# Allegro board BSTPLC.brd
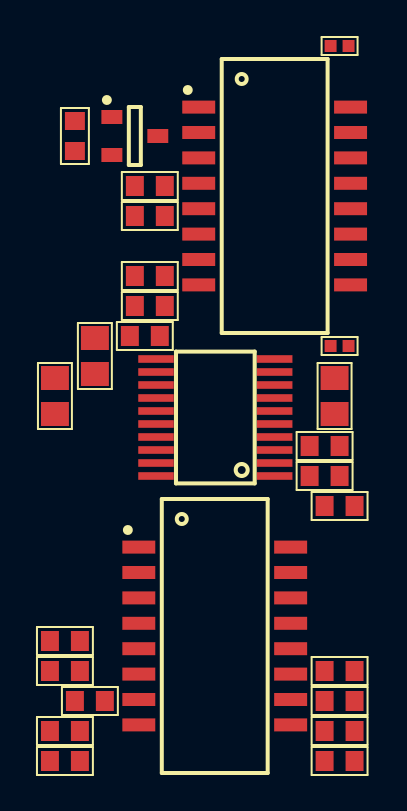
[diagram p0: board, top side]
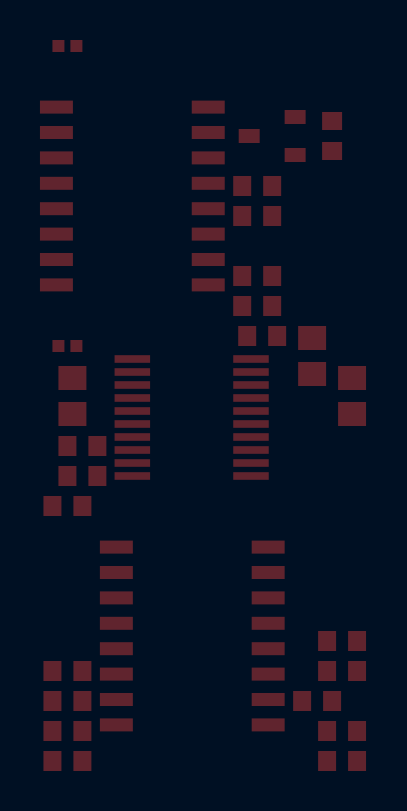
[diagram p1: board, bottom side, seen from below]

No outline. copper layers: TOP, LAYER2, LAYER3, LAYER4, LAYER5, BOTTOM. Coordinates in mm from the lowest, leftmost part position.

## Placement (name value [footprint] x y rotation side)
C1  100nF  [C0603]  1 31.25 270 top
C2  10nF  [C0603]  4.75 24.25 0 top
C3  1.0uF  [C0603]  14.25 4.5 0 top
C4  1.0uF  [C0603]  0.5 4.5 0 top
C6  1.0uF  [C0603]  0.5 6 0 top
C7  100nF  [C0603]  14.25 1.5 0 top
C8  100nF  [C0603]  0.5 1.5 0 top
C9  100nF  [C0603]  14.25 0 0 top
C10  100nF  [C0603]  0.5 0 0 top
D1  -  [SOT95P240X130-3N]  4 31.25 0 top
IC1  -  [SOIC127P835X237-16N]  11 28.25 0 top
IC2  -  [TSSOP20MA_065]  11 14.25 90 top
IC3  -  [SOIC127P835X237-16N]  8 6.25 0 top
R1  51  [C0402]  14.25 35.75 0 top
R2  12  [C0805]  14 18.25 90 top
R3  51  [C0603]  4.75 28.75 0 top
R4  51  [C0402]  14.25 20.75 0 top
R5  100  [C0603]  4.75 22.75 0 top
R6  100  [C0805]  2 20.25 270 top
R7  100  [C0603]  4.75 27.25 0 top
R8  100  [C0805]  0 18.25 90 top
R9  33k  [C0603]  13.5 15.75 0 top
R10  XX  [C0603]  4.5 21.25 0 top
R11  75  [C0603]  14.25 12.75 0 top
R12  75  [C0603]  14.25 3 0 top
R13  75  [C0603]  13.5 14.25 0 top
R14  75  [C0603]  1.75 3 0 top

## Library data of the parts
C1 C7-C10 = CAPCERSMDCL2: part number: CAPCERSMDCL2_0603-100NF,16V; tolerance: 10%
C2 = CAPCERSMDCL2: part number: CAPCERSMDCL2_0603-10NF,50V; tolerance: 10%
C3 C4 C6 = CAPCERSMDCL2: part number: CAPCERSMDCL2_0603-1.0UF,6.3V; tolerance: 10%
D1 = DIODE_DUAL_SERIES: part number: HBAT-540C
IC1 = DELAY_LINE_GL2L: part number: GL2L5LS050D-C
IC2 = MAX9601
IC3 = DELAY_LINE_GL2L: part number: GL2L5LS100D-C
R1 R4 = RSMD0402: part number: RSMD0402_1/16W-51,1%; tolerance: 1%
R2 = RSMD0805: part number: RSMD0805_125MW-12,1%; tolerance: 1%
R3 = RSMD0603: part number: RSMD0603_1/10W-51,1%; tolerance: 1%
R5 R7 = RSMD0603: part number: RSMD0603_1/10W-100,1%; tolerance: 1%
R6 R8 = RSMD0805: part number: RSMD0805_125MW-100,1%; tolerance: 1%
R9 = RSMD0603: part number: RSMD0603_1/10W-33K,1%; tolerance: 1%
R10 = RSMD0603: part number: RSMD0603_1/10W-XX,1%; tolerance: 1%
R11-R14 = RSMD0603: part number: RSMD0603_1/10W-75,1%; tolerance: 1%

## Footprints (pads in the part's own frame, mm; a bottom-side part is the same pattern mirrored in y, then rotated)
C0402
  rect 0.6x0.6 smd: 1(-0.45,0) 2(0.45,0)
C0603
  rect 0.9x1 smd: 1(-0.75,0) 2(0.75,0)
C0805
  rect 1.2x1.4 smd: 1(-0.9,0) 2(0.9,0)
SOIC127P835X237-16N
  rect 1.65x0.65 smd: 1(-3.8,4.445) 2(-3.8,3.175) 3(-3.8,1.905) 4(-3.8,0.635) 5(-3.8,-0.635) 6(-3.8,-1.905) 7(-3.8,-3.175) 8(-3.8,-4.445) 9(3.8,-4.445) 10(3.8,-3.175) 11(3.8,-1.905) 12(3.8,-0.635) 13(3.8,0.635) 14(3.8,1.905) 15(3.8,3.175) 16(3.8,4.445)
SOT95P240X130-3N
  rect 1.05x0.7 smd: 1(-1.15,0.95) 2(-1.15,-0.95) 3(1.15,0)
TSSOP20MA_065
  rect 0.381x1.778 smd: 1(0,0) 2(0.65,0) 3(1.3,0) 4(1.95,0) 5(2.6,0) 6(3.25,0) 7(3.9,0) 8(4.55,0) 9(5.2,0) 10(5.85,0) 11(5.85,5.94) 12(5.2,5.94) 13(4.55,5.94) 14(3.9,5.94) 15(3.25,5.94) 16(2.6,5.94) 17(1.95,5.94) 18(1.3,5.94) 19(0.65,5.94) 20(0,5.94)

## Nets
GND_SIGNAL: C2.1(A<0>) C3.1(A<0>) C4.1(A<0>) C6.1(A<0>) C7.1(A<0>) C8.1(A<0>) C9.1(A<0>) C10.1(A<0>) IC1.1(SH<0>) IC1.3(SH<1>) IC1.4(SH<2>) IC1.5(SH<3>) IC1.6(SH<4>) IC1.8(SH<5>) IC1.9(SH<6>) IC1.11(SH<7>) IC1.12(SH<8>) IC1.13(SH<9>) IC1.14(SH<10>) IC1.16(SH<11>) IC2.4(LE<0>) IC2.17(LE<0>) IC3.1(SH<0>) IC3.3(SH<1>) IC3.4(SH<2>) IC3.5(SH<3>) IC3.6(SH<4>) IC3.8(SH<5>) IC3.9(SH<6>) IC3.11(SH<7>) IC3.12(SH<8>) IC3.13(SH<9>) IC3.14(SH<10>) IC3.16(SH<11>) R1.1(A<0>) R4.1(A<0>) R6.1(A<0>) R7.1(A<0>) R8.1(A<0>) R9.1(A<0>) R10.1(A<0>) R11.1(A<0>) R12.1(A<0>) R13.1(A<0>) R14.1(A<0>)
P2V5: C3.2(B<0>) C8.2(B<0>) IC2.3(VCCO_<0>) IC2.5(LE*<0>) IC2.16(LE*<0>) IC2.18(VCCO_<1>)
P5V: C1.2(B<0>) C4.2(B<0>) C7.2(B<0>) C10.2(B<0>) D1.2(C) IC2.7(VCC<0>) IC2.14(VCC<1>)
VIN: R2.1(A<0>)
CFD_OUT: IC3.7(B1) R14.2(B<0>)
CFD_OUT*: IC3.10(B2) R12.2(B<0>)
LEADING_EDGE_OUT: IC2.1(Q<0>) R13.2(B<0>)
LEADING_EDGE_OUT*: IC2.2(Q*<0>) R11.2(B<0>)
M5V: C1.1(A<0>) C6.2(B<0>) C9.2(B<0>) D1.1(A) IC2.6(VEE<0>) IC2.15(VEE<1>)
UNNAMED_1_CAPCERSMDCL2_I78_B: C2.2(B<0>) IC2.10(IN+<0>) R5.2(B<0>)
UNNAMED_1_DELAYLINEGL2L_I140_A1: D1.3(AC) IC1.2(A1) IC2.9(IN-<0>) R2.2(B<0>) R3.1(A<0>)
UNNAMED_1_DELAYLINEGL2L_I140_A2: IC1.15(A2) R1.2(B<0>)
UNNAMED_1_DELAYLINEGL2L_I140_B2: IC1.10(B2) R4.2(B<0>)
UNNAMED_1_MAX9601_I1_HYS: IC2.13(HYS<0>) R10.2(B<0>)
UNNAMED_1_MAX9601_I1_IN: IC2.11(IN+<0>) R3.2(B<0>) R7.2(B<0>)
UNNAMED_1_MAX9601_I1_IN_1: IC1.7(B1) IC2.12(IN-<0>) R6.2(B<0>) R8.2(B<0>)
UNNAMED_1_MAX9601_I1_Q: IC2.19(Q*<0>) IC3.15(A2)
UNNAMED_1_MAX9601_I1_Q_1: IC2.20(Q<0>) IC3.2(A1)
UNNAMED_1_MAX9601_I71_HYS: IC2.8(HYS<0>) R9.2(B<0>)
VTHRESH: R5.1(A<0>)
